# Altium PCB MINI_V001.PcbDoc
Units mm, origin at the board's own origin, x right, y up, seen from the top; angles counter-clockwise.
Board outline 42.31 x 45.25 mm, 2 copper layers (Top Layer, Bottom Layer); 51 components, 48 nets, 206 pads, 51 vias.
Unrouted connection lines stored in the file: 3.
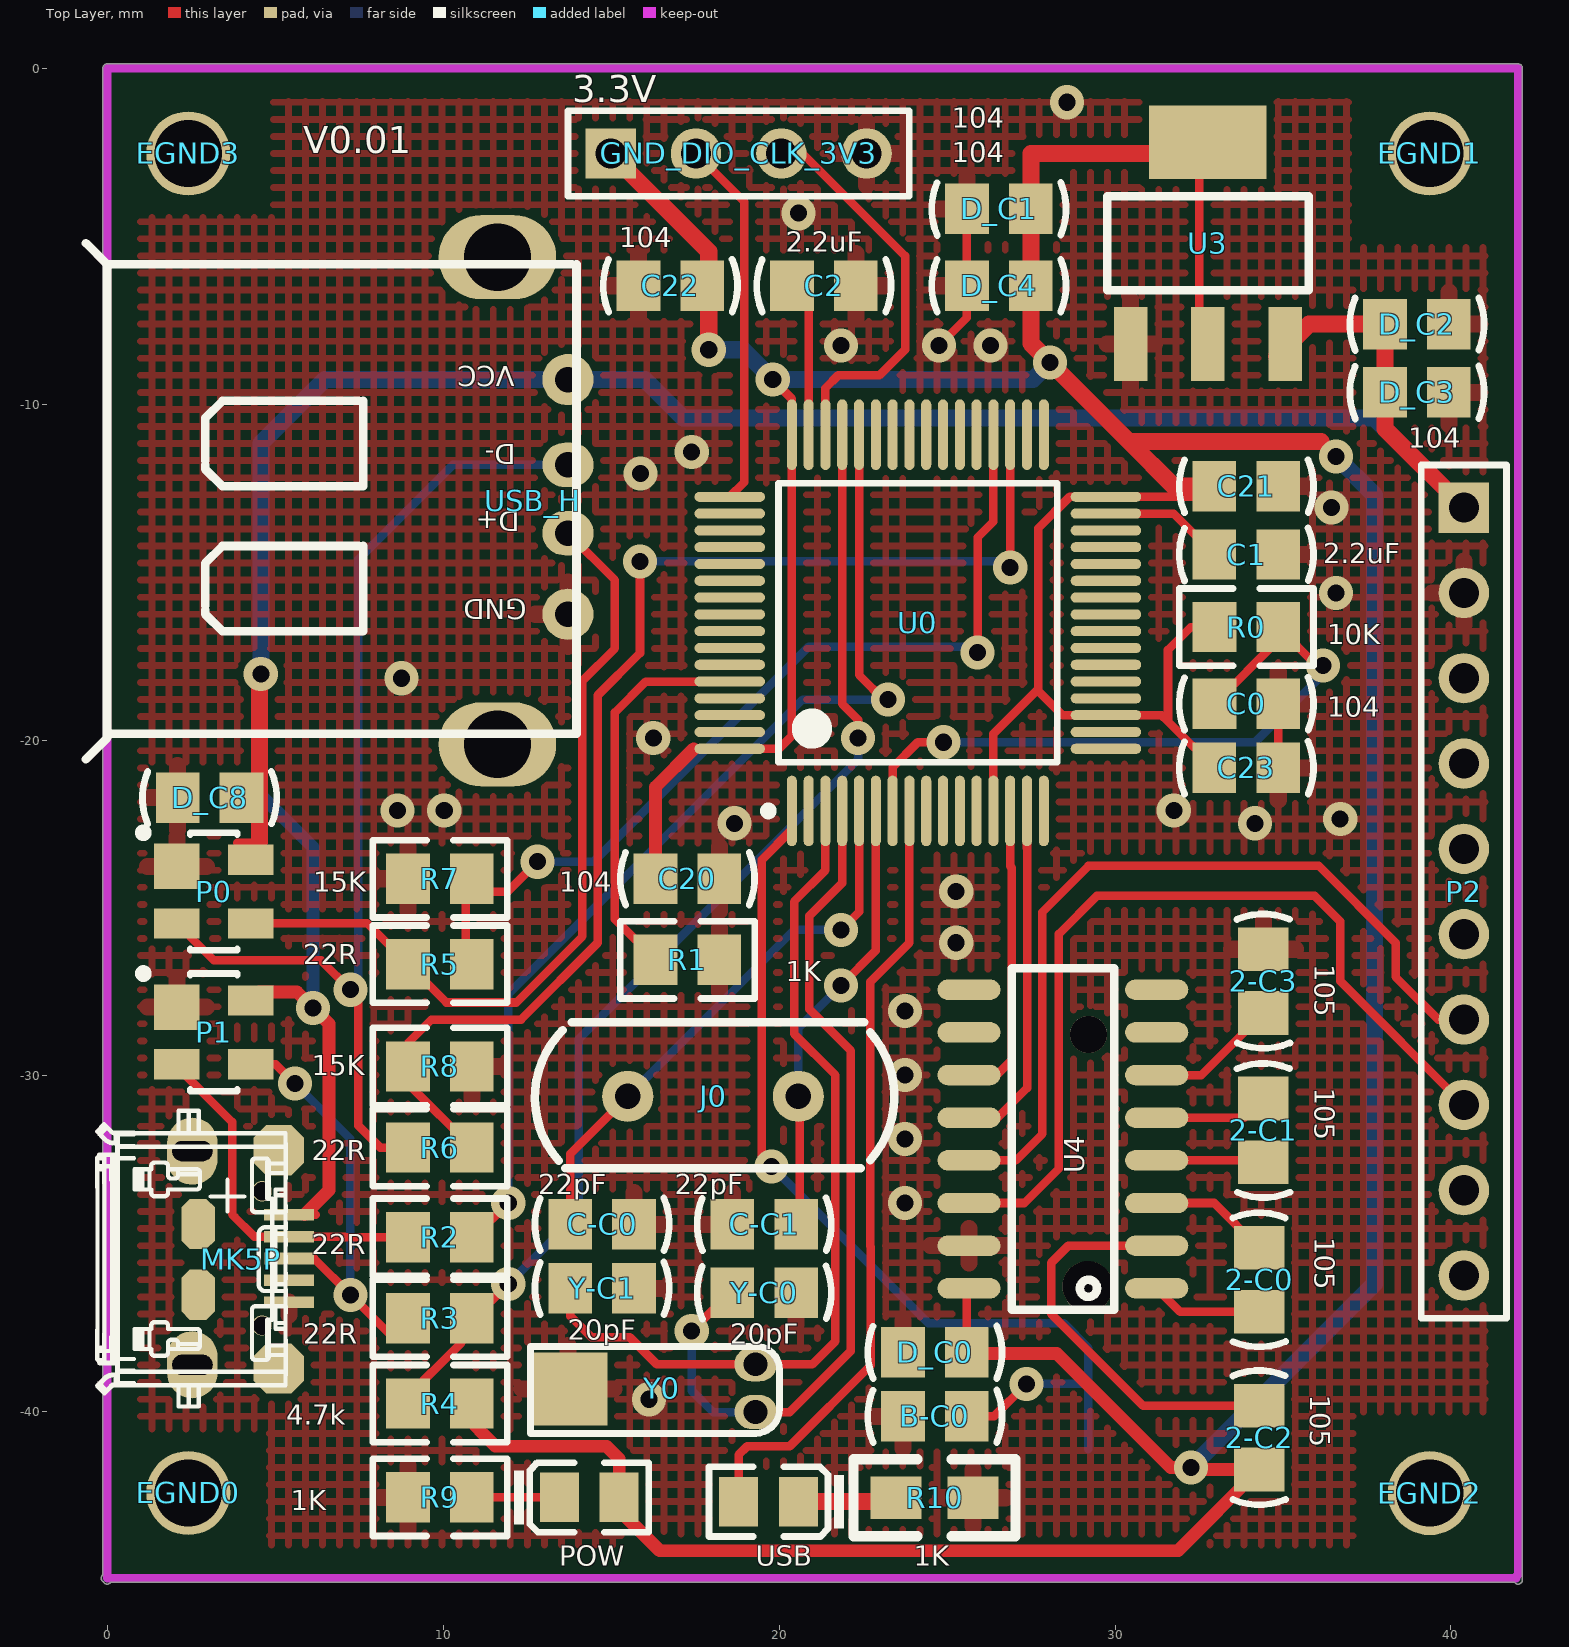
[diagram p0: Top Layer view]
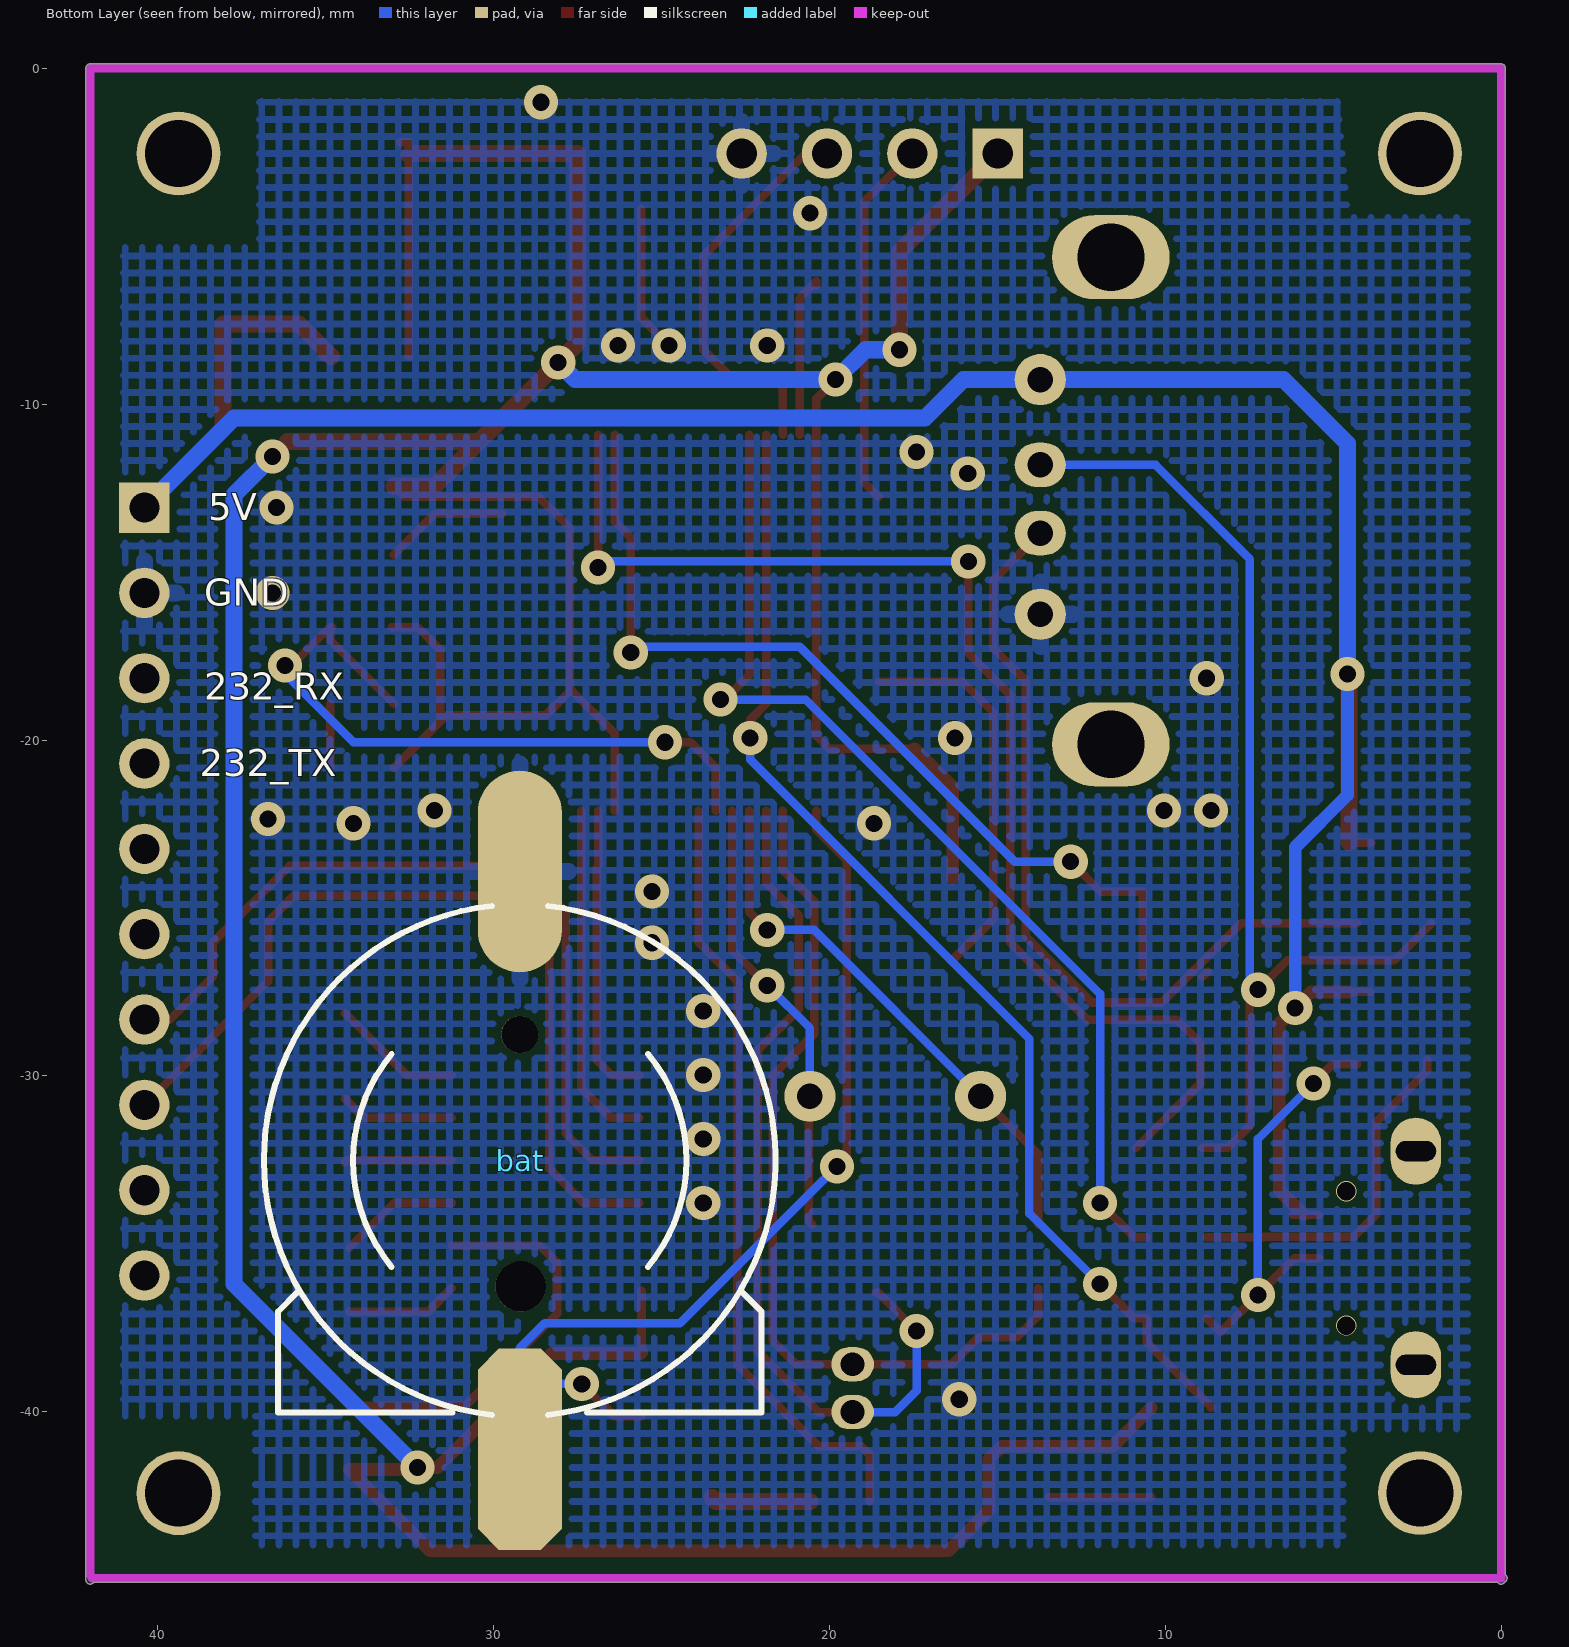
[diagram p1: Bottom Layer view, seen from below]

## Layer stack, top to bottom
Top Layer: signal copper 0.0356
Dielectric: dielectric 0.32, FR-4, Dk 4.8
Bottom Layer: signal copper 0.0356

## Board outline
-0.112,-45.061 cw(c-0.051,-44.949) -0.127,-44.847 -0.127,0 cw(c0,0) 0,0.127 42,0.127 cw(c42,0) 42.127,0 42.127,-45 cw(c42,-45) 41.898,-45.077 0.102,-45.077 cw(c0,-45)

## Design rules (kind name [scope] priority, off if disabled: settings)
Clearance Clearance_keepout [(OnLayer('Keep-Out Layer'))] p1: gap=0.762
Clearance Clearance_ploy [inpoly] p2: gap=0.203
Clearance [All] p3: gap=0.152
ComponentClearance [All] p1: gap=0.127 collisioncheckmode=3 verticalgap=0.254 showdistances=FALSE
DiffPairsRouting DiffPair_DiffPairsRouting [InDifferentialPair ('VOUT2')] p1: maxlimit=0.254 minlimit=0.254 mostfreqgap=0.254 maxuncoupledlength=12.7
DiffPairsRouting [All] p2: maxlimit=0.254 minlimit=-0.044 mostfreqgap=0.254 toplayer_maxgap=-0.044 toplayer_prefgap=3.693 bottomlayer_maxgap=-0.044 bottomlayer_prefgap=2.348 maxuncoupledlength=12.7
HoleSize [All] p1: absolutevalues=TRUE maxlimit=5 minlimit=0.025 maxpercent=80.000 minpercent=20.000
HoleSize FabricationTestpoint [All] p2: absolutevalues=TRUE maxlimit=2.54 minlimit=0.025 maxpercent=80.000 minpercent=20.000
HoleSize FabricationTestPointUsage [All] p3: absolutevalues=TRUE maxlimit=2.54 minlimit=0.025 maxpercent=80.000 minpercent=20.000
Length [All] p1: maxlimit=152.4 minlimit=0
MatchedLengths DiffPair_MatchedLengths [InDifferentialPair ('VOUT2')] p1: tolerance=25.4 checknetsindiffpair=TRUE checkdiffpairvsdiffpair=TRUE checkothers=TRUE
MinimumSolderMaskSliver [All] p1: minsoldermaskwidth=0
MinimumSolderMaskSliver SilkToSolderMaskClearance [IsPad] p2: minsoldermaskwidth=0.254
NetAntennae AssemblyTestpoint [All] p1: netantennaetolerance=0
NetAntennae [All] p2: netantennaetolerance=0
NetAntennae AssemblyTestPointUsage [All] p3: netantennaetolerance=0
NetAntennae UnpouredPolygon [All] p4: netantennaetolerance=0
NetAntennae SilkToBoardRegionClearance [All] p5: netantennaetolerance=0
PlaneConnect [All] p1: planeconnectstyle=Direct reliefexpansion=0.508 reliefentries=4 reliefconductorwidth=0.254 reliefairgap=0.254
PolygonConnect PolygonConnect_VIA [ISVIA] p1: connectstyle=Direct reliefconductorwidth=0.254 reliefentries=4 polygonreliefangle="90 Angle"
PolygonConnect [All] p2: connectstyle=Relief reliefconductorwidth=0.508 reliefentries=4 polygonreliefangle="90 Angle"
RoutingVias [All] p1: holewidth=0.4 width=0.8 viastyle="Through Hole" minholewidth=0.3 minwidth=0.6 maxholewidth=1 maxwidth=2
SilkToSilkClearance [All] p1: silktosilkclearance=0
SilkscreenOverComponentPads [All] p1: minsilkscreentomaskgap=0.254
SolderMaskExpansion [All] p1: expansion=0.102
TestPointUsage [All] p1: valid=0 allowmultiple=FALSE
Testpoint [All] p1: side=15 testpointundercomponent=TRUE minsize=1.016 maxsize=2.54 preferedsize=1.524 minholesize=0 maxholesize=1.016 preferedholesize=0.813 testpointgrid=0.025 style=1023 order=0-112345678
Width Width_VCC3.3 [InNet('G+3V3')] p1: maxlimit=2.54 minlimit=0.305 preferedwidth=0.305
Width DiffPair_Width [InDifferentialPair('VOUT2')] p2: maxlimit=0.254 minlimit=0.254 preferedwidth=0.254
Width [All] p3: maxlimit=2.54 minlimit=0.152 preferedwidth=0.203
16 further rules are at their usual default settings.

## Components (designator, comment, footprint, x,y, rotation, side; value= is the part's Value field where it differs from the comment)
2-C0 "105" C-RAD-0805 34.29,-36.068 r270 top
2-C1 "105" C-RAD-0805 34.417,-31.623 r270 top
2-C2 "105" C-RAD-0805 34.29,-40.767 r90 top
2-C3 "105" C-RAD-0805 34.417,-27.178 r270 top
B-C0 "C104" C-RAD-0805 24.638,-40.132 r0 top
bat "Battery" BATM 29.21,-32.512 r180 bottom
C0 "104" C-RAD-0805 33.909,-18.923 r0 top
C1 "2.2uF" C-RAD-0805 33.909,-14.478 r0 top
C2 "2.2uF" C-RAD-0805 21.336,-6.477 r0 top
C20 "104" C-RAD-0805 17.272,-24.13 r180 top
C21 "106" C-RAD-0805 33.909,-12.446 r180 top
C22 "104" C-RAD-0805 16.764,-6.477 r0 top
C23 "106" C-RAD-0805 33.909,-20.828 r180 top
C-C0 "22pF" C-RAD-0805 14.732,-34.417 r180 top
C-C1 "22pF" C-RAD-0805 19.558,-34.417 r0 top
D_C0 "106" C-RAD-0805 24.638,-38.227 r0 top
D_C1 "104" C-RAD-0805 26.543,-4.191 r0 top
D_C2 "106" C-RAD-0805 38.989,-7.62 r0 top
D_C3 "104" C-RAD-0805 38.989,-9.652 r0 top
D_C4 "104" C-RAD-0805 26.543,-6.477 r0 top (schematic designator D_C1)
D_C8 "106" C-RAD-0805 3.048,-21.717 r0 top (schematic designator D_C2)
EGND0 "1孔" HOLEx1 2.413,-42.412 r0 top
EGND1 "1孔" HOLEx1 39.37,-2.54 r0 top
EGND2 "1孔" HOLEx1 39.37,-42.418 r0 top
EGND3 "1孔" HOLEx1 2.413,-2.54 r0 top
GND_DIO_CLK_3V3 "Header 4" HDR1X4 14.986,-2.54 r0 top
J0 "25M" 晶振HC-49S 18.034,-30.607 r180 top
MK5P "五脚端子" USB-MICRO1 5.08,-35.433 r90 top
P0 "PRTR5V0U2X" SOT-143 3.175,-24.511 r270 top
P1 "PRTR5V0U2X" SOT-143 3.175,-28.702 r270 top
P2 "Header 10" HDR1X10 40.386,-13.081 r270 top
POW "Rled" 0805_LED_S1 14.351,-42.545 r0 top (schematic designator D0)
R0 "10K" R2012-0805 33.909,-16.637 r0 top
R1 "1K" R2012-0805 17.272,-26.543 r0 top
R2 "22R" R2012-0805 9.906,-34.798 r180 top
R3 "22R" R2012-0805 9.906,-37.211 r180 top
R4 "4.7k" R2012-0805 9.906,-39.751 r0 top
R5 "22R" R2012-0805 9.906,-26.67 r180 top
R6 "22R" R2012-0805 9.906,-32.131 r180 top
R7 "15K" R2012-0805 9.906,-24.13 r180 top
R8 "15K" R2012-0805 9.906,-29.718 r0 top
R9 "1K" R2012-0805 9.906,-42.545 r0 top
R10 "1K" 0805 25.781,-42.545 r180 top
U0 "STM32F205RBT6" LQFP-64 24.13,-16.51 r90 top
U3 "AMS1117-3.3" SOT-223 32.766,-5.207 r270 top
U4 "MAX3232" SOP-16 31.242,-36.322 r90 top
USB "Bled" 0805_LED_S1 19.685,-42.672 r180 top (schematic designator D1)
USB_H "五脚端子" USB 13.716,-9.271 r180 top
Y0 "32.768M" XTAL32 19.304,-40.005 r180 top
Y-C0 "20pF" C-RAD-0805 19.558,-36.449 r180 top
Y-C1 "20pF" C-RAD-0805 14.732,-36.322 r180 top

## Footprints (in the part's own frame and the unit in brackets; to place one, negate y for a bottom-side part, rotate by r counter-clockwise, add the part's x,y. Pads: shape width x height; smd on the part's side, far side on the other; paste and mask are expansions set on the pad)
0805 [mil]
  rect 60x50 smd: 1(0.41,0.4) 2(90.41,0.4)
  silkscreen extent -50,-45 140,45
0805_LED_S1 [mm]
  rect 1.16x1.47 smd: A(0.89,0) K(-0.89,0)
  silkscreen extent -2.25,-1.03 1.77,1.03, body extent -1.01,-0.62 1.01,0.62, height 1.1
BATM [mm]
  round 1.1 hole 1.1 unplated: 0(0,3.748)
  round 1.5 hole 1.5 unplated: 0(0.025,-3.752)
  oct 2.5x6 smd: 1(0,-8.602)
  oval 2.5x6 smd: 2(0,8.598)
  silkscreen extent -7.62,-7.58 7.62,7.57
C-RAD-0805 [mm] "贴片电容"
  rect 1.3x1.5 smd: 1(-0.95,0) 2(0.95,0)
  silkscreen extent -2,-0.79 2,0.79, body extent -1.27,-0.64 1.27,0.64, height 0.9
HDR1X4 [mm] "Connector; Header; 4 Position"
  rect 1.5x1.5 hole 0.9: 1(0,0)
  round 1.5 hole 0.9: 2(2.54,0) 3(5.08,0) 4(7.62,0)
  silkscreen extent -1.27,-1.27 8.89,1.27
HDR1X10 [mm] "Connector; Header; 10 Position"
  rect 1.5x1.5 hole 0.9: 1(0,0)
  round 1.5 hole 0.9: 2(2.54,0) 3(5.08,0) 4(7.62,0) 5(10.16,0) 6(12.7,0) 7(15.24,0) 8(17.78,0) 9(20.32,0) 10(22.86,0)
  silkscreen extent -1.27,-1.27 24.13,1.27
HOLEx1 [mm]
  round 2.5 hole 2: 1(0,0)
LQFP-64 [mm] "LQFP64"
  oval 2.1x0.3 smd: 1(-5.6,3.75) 2(-5.6,3.25) 3(-5.6,2.75) 4(-5.6,2.25) 5(-5.6,1.75) 6(-5.6,1.25) 7(-5.6,0.75) 8(-5.6,0.25) 9(-5.6,-0.25) 10(-5.6,-0.75) 11(-5.6,-1.25) 12(-5.6,-1.75) 13(-5.6,-2.25) 14(-5.6,-2.75) 15(-5.6,-3.25) 16(-5.6,-3.75) 33(5.6,-3.75) 34(5.6,-3.25) 35(5.6,-2.75) 36(5.6,-2.25) 37(5.6,-1.75) 38(5.6,-1.25) 39(5.6,-0.75) 40(5.6,-0.25) 41(5.6,0.25) 42(5.6,0.75) 43(5.6,1.25) 44(5.6,1.75) 45(5.6,2.25) 46(5.6,2.75) 47(5.6,3.25) 48(5.6,3.75)
  oval 0.3x2.1 smd: 17(-3.75,-5.6) 18(-3.25,-5.6) 19(-2.75,-5.6) 20(-2.25,-5.6) 21(-1.75,-5.6) 22(-1.25,-5.6) 23(-0.75,-5.6) 24(-0.25,-5.6) 25(0.25,-5.6) 26(0.75,-5.6) 27(1.25,-5.6) 28(1.75,-5.6) 29(2.25,-5.6) 30(2.75,-5.6) 31(3.25,-5.6) 32(3.75,-5.6) 49(3.75,5.6) 50(3.25,5.6) 51(2.75,5.6) 52(2.25,5.6) 53(1.75,5.6) 54(1.25,5.6) 55(0.75,5.6) 56(0.25,5.6) 57(-0.25,5.6) 58(-0.75,5.6) 59(-1.25,5.6) 60(-1.75,5.6) 61(-2.25,5.6) 62(-2.75,5.6) 63(-3.25,5.6) 64(-3.75,5.6)
  silkscreen extent -5.72,-4.15 4.15,4.57, body extent -5,-5 5,5, height 1.6
R2012-0805 [mm] "Thermistor; 2 Leads"
  rect 1.3x1.5 smd: 1(-0.95,0) 2(0.95,0)
  silkscreen extent -2,-1.15 2,1.15, body extent -1.02,-0.64 0.98,0.62
SOP-16 [mil]
  oval 24x74 smd: 1(0,0) 2(50,0) 3(100,0) 4(150,0) 5(200,0) 6(250,0) 7(300,0) 8(350,0) 9(350,220) 10(300,220) 11(250,220) 12(200,220) 13(150,220) 14(100,220) 15(50,220) 16(0,220)
  silkscreen extent -25,50 375,170, body extent -19,-5 367,223, height 69
SOT-143 [mm] "SOT-143; 4 Leads; Body 3 x 2.6 mm, inc. leads (LxW max)"
  rect 1.35x1.35 smd: 1(-0.75,-1.1)
  rect 0.9x1.35 smd: 2(0.95,-1.1) 3(0.95,1.1) 4(-0.95,1.1)
  silkscreen extent -1.87,-2.22 1.75,0.7
SOT-223 [mm]
  rect 2.2x1 smd: 1(3,-2.3) 2(3,0) 3(3,2.3)
  rect 2.2x3.5 smd: 2(-3,0)
  silkscreen extent -1.4,-3 1.4,3, body extent -3.49,-3.24 3.49,3.24, height 1.64
USB [mil]
  round 60 hole 30: 1(0,0) 4(0,275)
  oval 60x52.13 hole 30: 2(0,100) 3(0,180)
  oval 137.79x98.42 hole 78.74: VSS(82.68,427.44) VSS2(82.68,-143.43)
  silkscreen extent -10,-160 565,445, body extent -16,-173 539,449, height 250
USB-MICRO1 [mm] "USB AF/10.0 4P母座卷边SMT(前插后贴) H=6.8mm"
  rect 0.35x1.5 smd: 1(-1.3,-0.33) 2(-0.65,-0.33) 3(0,-0.33) 4(0.65,-0.33) 5(1.3,-0.33)
  oct 1.5x1.5 smd: ""(-3.275,-0.025) ""(3.225,-0.025)
  oval 2x1.5 hole 0.6 slot 1.2 at 90 deg: ""(-3.165,2.545) ""(3.195,2.545)
  oct 1.5x1 smd: ""(-1.075,2.375) ""(1.025,2.375)
  silkscreen extent -4.41,-0.23 4.4,5.39
XTAL32 [mil]
  oval 50x40 hole 28: 1(0,0) 2(0,-56)
  rect 92.13x86 smd: ""(220,-27)
  silkscreen extent -28,-77 264,25
晶振HC-49S [mil]
  round 60 hole 30: 1(100,0) 2(-100,0)
  silkscreen extent -212,-87 209,84, body extent -223,-93 223,90, height 138

## Part data
2-C0 2-C1 2-C2 2-C3: library part "0805 1uF (105) 10% 50V", "贴片电容"
B-C0: library part "Cap Semi", "Capacitor (Semiconductor SIM Model)"
bat: "Multicell Battery"
C0 D_C0 D_C1 D_C2 D_C3 D_C4 D_C8: library part "0805 100nF(104) 10% 50V", "贴片电容"
C1 C2: library part "0805 2.2uF (225) 20% 50V", "贴片电容"
C20 C21 C22 C23: library part Cap, "Capacitor"
C-C0 C-C1: library part "0603 22pF (220) 5% 50V", "贴片电容"
GND_DIO_CLK_3V3: "Header, 4-Pin"
J0: library part 晶振
P2: "Header, 10-Pin"
POW: library part "0805 红灯", "发光二极管"
R0 R2 R3 R4 R5 R6 R7 R8 R9 R10: library part "0805 1KΩ (1001) 1%", "贴片电阻"
R1: library part "0603 1KΩ (1001) 1%", "贴片电阻"
U0: "ARM Cortex-M3 32-bit MCU, 128 KB Flash, 64 KB Internal RAM, 51 I/Os, 64-pin LQFP, -40 to 85 degC, Tray"
U3: library part "SOT-223 AMS1117-3.3", "低压差线性稳压(LDO)"
USB: library part "0805 蓝灯", "发光二极管"
Y0: library part XTAL, "Crystal Oscillator"
Y-C0 Y-C1: library part "0805 20pF (200) 5% 50V", "贴片电容"

## Via types
v1: diameter 1.016, hole 0.508, Top Layer to Bottom Layer, 49 vias
v2: diameter 0.6, hole 0.55, Top Layer to Bottom Layer, 2 vias

## Nets (pads, with @x,y where several pads share a name; then routed paths per layer and width w, separated by ;. In a path a pad name is that pad's centre, name@x,y a point inside that pad or via, vN(x,y) a via of type N, cw(c..) or ccw(c..) an arc to the next point about the centre after c; other vN are vias at no path point)
BAT: B-C0.2 bat.1 U0.1 | length 29.8
  Top Layer w0.254: v1(19.771,-32.69) 19.482,-32.4 19.482,-23.571 20.38,-22.673 U0.1 ; B-C0.2 26.401,-40.132 v1(27.366,-39.167)
  Bottom Layer w0.254: v1(19.771,-32.69) 24.445,-37.363 28.473,-37.363 29.21,-38.1 bat.1@29.21,-39.167 ; v1(27.366,-39.167) bat.1@29.21,-39.167 ; bat.1 bat.1@29.21,-39.167
GND: 2-C3.1 B-C0.1 bat.2 C0.2 C1.2 C2.2 C20.1 C21.1 C22.1 C23.1 C-C0.1 C-C1.1 D_C0.1 D_C1.1 D_C2.2 D_C3.2 D_C4.1 D_C8.1 GND_DIO_CLK_3V3.4 MK5P.1 P0.1 P1.1 P2.2 R1.2 R7.2 R8.2 R9.1 R10.1 U0.12 U0.18 U0.63 U3.1 U4.15 USB_H.4 Y0. Y-C0.1 Y-C1.1 | length 6.3
  Top Layer w0.254: v1(24.765,-8.255) 25.593,-7.427 D_C4.1 D_C1.1 ; C23.1 C0.2
  other v1: 16.129,-39.624 23.749,-33.782 23.749,-31.877 23.749,-29.972 23.749,-28.067 25.273,-26.035 25.273,-24.511 18.669,-22.479 34.163,-22.479 36.703,-22.352 8.636,-22.098 10.033,-22.098 31.75,-22.098 16.256,-19.939 8.763,-18.161 36.576,-15.621 36.449,-13.081 15.875,-12.065 17.399,-11.43 21.844,-8.255 26.289,-8.255 20.574,-4.318 28.575,-1.016
IO2: P0.2 R6.2 USB_H.2 | length 31.8
  Top Layer w0.254: P0.2 3.175,-26.561 6.368,-26.561 v1(7.239,-27.432) ; v1@7.478,-27.432 7.478,-31.481 8.128,-32.131 R6.2@8.889,-32.131
  Bottom Layer w0.254: v1@7.478,-27.356 7.478,-14.62 10.287,-11.811 USB_H.2
IO3: P0.3 R5.2 USB_H.3 | length 24.9
  Top Layer w0.254: P0.3 7.747,-25.461 R5.2 10.099,-27.813 12.18,-27.813 14.148,-25.846 14.148,-18.237 15.113,-17.272 15.113,-15.24 USB_H.3 ; R5.2@8.732,-26.894 R5.2@8.889,-27.051
IO4: MK5P.4 P1.2 R2.2 | length 10.7
  Top Layer w0.254: P1.2@2.202,-29.525 2.202,-29.652 2.202,-29.852 3.719,-31.369 3.719,-34.123 ; 3.81,-34.214 3.719,-34.123 ; R2.2@8.762,-34.798 7.086,-34.798 7.071,-34.783 MK5P.4 4.379,-34.783 3.719,-34.123
IO5: MK5P.3 P1.3 R3.2 | length 13.3
  Top Layer w0.254: P1.3 5.014,-29.652 v1(5.588,-30.226) ; MK5P.3 6.157,-35.433 v1(7.239,-36.515) 8.349,-37.624 R3.2@8.762,-37.211
  Bottom Layer w0.254: v1(5.588,-30.226) 7.239,-31.877 7.239,-32.629 ; v1(7.239,-36.515) 7.239,-32.629 ; 7.239,-33.02 7.239,-32.629
LED0: U0.8 USB.A | length 23.4
  Top Layer w0.254: USB.A 18.795,-41.276 19.05,-41.021 20.32,-41.021 22.733,-38.608 22.733,-35.079 22.718,-35.064 22.718,-27.197 23.88,-26.035 U0.8
LED1: U0.9
Net2-C0_1: 2-C0.1 U4.3 | length 3.6
  Top Layer w0.254: U4.3 32.954,-33.782 2-C0.1
Net2-C0_2: 2-C0.2 U4.1 | length 3.3
  Top Layer w0.254: U4.1 31.938,-37.018 2-C0.2
Net2-C1_1: 2-C1.1 U4.5 | length 3.4
  Top Layer w0.254: U4.5 33.848,-31.242 2-C1.1
Net2-C1_2: 2-C1.2 U4.4 | length 3.2
  Top Layer w0.254: U4.4 34.356,-32.512 2-C1.2
Net2-C2_2: 2-C2.2 U4.2 | length 12.2
  Top Layer w0.254: U4.2 28.611,-35.052 28.103,-35.56 28.103,-37.084 30.836,-39.817 2-C2.2
Net2-C3_2: 2-C3.2 U4.6 | length 3.9
  Top Layer w0.254: U4.6 32.573,-29.972 2-C3.2
NetC1_1: C1.1 U0.31 | length 3.7
  Top Layer w0.254: U0.31 31.741,-13.26 C1.1
NetC2_1: C2.1 U0.47 | length 4.9
  Top Layer w0.254: C2.1 20.386,-6.35 20.449,-6.413 20.88,-6.844 U0.47
NetD0_K: POW.K R9.2 | length 3
  Top Layer w0.254: R9.2@10.415,-42.545 R9.2 POW.K
NetD1_K: R10.2 USB.K | length 3
  Top Layer w0.508: USB.K 23.368,-42.672 R10.2
NetR1_1: R1.1 U0.60 | length 11.7
  Top Layer w0.254: R1.1 15.113,-25.334 15.113,-19.177 16.03,-18.26 U0.60 ; R1.1@16.352,-26.513 R1.1@16.382,-26.543
NRST: C0.1 R0.2 U0.7 | length 20.9
  Top Layer w0.254: U0.7 23.38,-20.816 24.13,-20.066 v1(24.892,-20.066) ; C0.1 34.859,-17.023 R0.2 36.002,-17.78 v1(36.195,-17.78) 36.576,-17.78 v1@36.449,-17.653 ; R0.2@34.799,-16.637 R0.2@34.829,-16.667
  Bottom Layer w0.254: v1(24.892,-20.066) 34.163,-20.066 v1@36.322,-17.907
OSC32_IN: U0.3 Y0.2 Y-C1.2 | length 26.3
  Top Layer w0.254: Y-C1.2 13.782,-37.15 14.412,-37.78 15.555,-37.78 16.358,-38.583 Y0.2 20.991,-38.583 21.676,-37.897 21.676,-29.972 20.447,-28.743 20.447,-24.809 21.38,-23.876 U0.3
OSC32_OUT: U0.4 Y0.1 Y-C0.2 | length 26.2
  Top Layer w0.254: v1(17.399,-37.592) 18.542,-36.449 Y-C0.2 ; Y0.1 20.32,-40.005 22.134,-38.191 22.134,-29.246 20.904,-28.016 20.904,-25.233 21.88,-24.257 U0.4
  Bottom Layer w0.254: v1(17.399,-37.592) 17.399,-39.37 18.034,-40.005 Y0.1
OSC_IN: C-C0.2 J0.1 U0.5 | length 16.7
  Top Layer w0.254: C-C0.2 13.782,-32.319 J0.1 ; v1(21.844,-25.654) 22.38,-25.118 U0.5
  Bottom Layer w0.254: J0.1 20.447,-25.654 v1(21.844,-25.654)
OSC_OUT: C-C1.2 J0.2 U0.6 | length 13.3
  Top Layer w0.254: C-C1.2 20.61,-34.315 20.61,-30.643 J0.2 ; v1(21.844,-27.305) 22.88,-26.269 U0.6
  Bottom Layer w0.254: J0.2 20.574,-28.575 v1(21.844,-27.305)
RS232_RX: P2.7 U4.13 | length 25.4
  Top Layer w0.254: U4.13 27.051,-32.512 27.838,-31.725 27.838,-27.026 ; 27.838,-27.686 27.838,-27.026 ; P2.7 39.624,-28.321 38.354,-27.051 38.354,-26.035 36.068,-23.749 29.21,-23.749 27.838,-25.121 27.838,-27.026
RS232_TX: P2.8 U4.14 | length 26.6
  Top Layer w0.254: U4.14 27.305,-33.782 28.33,-32.757 28.33,-27.296 ; 28.33,-27.686 28.33,-27.296 ; P2.8 36.703,-27.178 36.703,-25.4 35.941,-24.638 29.464,-24.638 28.33,-25.772 28.33,-27.296
RS485_RE: U0.33
SD_CK: U0.53
SD_CMD: U0.54
SD_D0: U0.39
SD_D1: U0.40
SD_D2: U0.51
SD_D3: U0.52
SD_EXTI: U0.41
SW_CLK: GND_DIO_CLK_3V3.2 U0.49 | length 11.3
  Top Layer w0.254: GND_DIO_CLK_3V3.2 18.959,-3.973 18.959,-10.312 ; U0.49 18.959,-12.331 18.959,-10.312 ; 18.959,-10.033 18.959,-10.312
SWDIO: GND_DIO_CLK_3V3.3 U0.46 | length 12
  Top Layer w0.254: GND_DIO_CLK_3V3.3 20.701,-2.54 23.749,-5.588 23.749,-8.382 22.987,-9.144 21.761,-9.144 21.38,-9.525 U0.46
UART1_RX: U0.43
UART1_TX: U0.42
UART4_RX: U0.15 U4.12 | length 10.3
  Top Layer w0.254: U4.12 26.502,-31.242 27.381,-30.363 27.381,-23.216 27.38,-23.214 U0.15
UART4_TX: U0.14 U4.11 | length 8.9
  Top Layer w0.254: U4.11 26.477,-29.972 26.924,-29.525 26.924,-23.8 26.88,-23.756 U0.14
UART6_RX: U0.38
UART6_TX: U0.37
USB_D+: R3.1 R4.1 U0.45 | length 35.1
  Top Layer w0.254: R4.1@8.635,-39.878 8.635,-39.85 8.845,-39.64 10.542,-37.943 10.542,-37.211 R3.1 10.922,-37.211 v1(11.938,-36.195) ; U0.45 21.88,-18.923 22.352,-19.395 v1(22.352,-19.939)
  Bottom Layer w0.254: v1(11.938,-36.195) 14.039,-34.094 14.039,-28.898 22.352,-20.584 v1(22.352,-19.939)
USB_D-: R2.1 U0.44 | length 31.3
  Top Layer w0.254: R2.1@10.542,-34.798 R2.1 10.922,-34.798 v1(11.938,-33.782) ; U0.44 22.38,-18.062 23.177,-18.86 v1@23.368,-19.05
  Bottom Layer w0.254: v1(11.938,-33.782) 11.938,-27.559 20.701,-18.796 v1@22.987,-18.796
  other v1: 23.241,-18.796
USB_HD+: R5.1 R7.1 U0.36 | length 27.8
  Top Layer w0.254: R5.1@10.669,-27.051 10.669,-26.67 10.669,-24.511 10.856,-24.511 11.923,-24.511 v1(12.812,-23.622) ; v1(25.908,-17.399) 25.908,-13.97 26.38,-13.498 U0.36
  Bottom Layer w0.254: v1(12.812,-23.622) 14.478,-23.622 20.879,-17.221 23.531,-17.221 ; 23.241,-17.221 23.531,-17.221 ; v1(25.908,-17.399) 25.73,-17.221 23.531,-17.221
USB_HD-: R6.1 R8.1 U0.35 | length 37.7
  Top Layer w0.254: R6.1 8.956,-30.231 R8.1 8.956,-29.017 9.652,-28.321 12.319,-28.321 14.605,-26.035 14.605,-18.669 15.86,-17.414 v1(15.86,-14.681) ; v1(26.88,-14.859) U0.35
  Bottom Layer w0.254: v1(15.86,-14.681) 26.702,-14.681 v1(26.88,-14.859)
VCC_3.3V: 2-C2.1 C20.2 C21.2 C22.2 C23.2 D_C0.2 D_C1.2 D_C4.2 GND_DIO_CLK_3V3.1 POW.A R0.1 R4.2 U0.13 U0.19 U0.32 U0.48 U0.64 U3.2 U4.16 | length 163.6
  Top Layer w0.254: 17.459,-20.26 U0.64 20,-20.26 20.38,-19.88 U0.48 20.38,-9.839 v1(19.812,-9.271) ; D_C0.2 U4.16@25.588,-36.388 ; U0.13 26.38,-19.812 27.686,-18.506 ; U3.2@32.512,-8.588 32.512,-8.207 32.512,-2.588 32.512,-2.207 U3.2@32.766,-2.207 ; C23.2 31.577,-19.446 ; C21.2 32.645,-12.76 U0.32 28.651,-12.76 27.718,-13.693 27.718,-18.474 27.686,-18.506 ; R0.1@33.019,-16.637 R0.1 32.258,-16.637 31.577,-17.318 31.577,-19.446 ; 27.686,-18.506 28.44,-19.26 U0.19 31.391,-19.26 31.577,-19.446
  Top Layer w0.381: R4.2@10.415,-39.878 10.572,-40.035 11.558,-41.021 14.859,-41.021 15.241,-41.403 POW.A 15.241,-42.927 16.447,-44.133 31.875,-44.133 2-C2.1 v1@32.258,-41.717 ; C20.2 16.322,-21.397 17.459,-20.26 ; D_C0.2 25.626,-38.265 28.268,-38.265 31.659,-41.656 v1(32.258,-41.656)
  Top Layer w0.508: GND_DIO_CLK_3V3.1 17.907,-5.461 17.907,-6.477 v1(17.907,-8.382) v1@17.907,-8.509 ; U3.2@32.512,-2.588 32.464,-2.54 27.493,-2.54 D_C1.2 D_C4.2 27.493,-8.189 v1(28.067,-8.763) 30.416,-11.112 ; C21.2 31.75,-12.446 30.416,-11.112 ; 36.131,-11.112 30.416,-11.112
  Bottom Layer w0.508: v1(17.907,-8.382) 18.923,-8.382 v1(19.812,-9.271) 27.559,-9.271 v1(28.067,-8.763) ; v1(32.258,-41.656) 37.719,-36.195 37.719,-12.7 v1(36.576,-11.557)
VCC_5V: D_C2.1 D_C3.1 D_C8.2 MK5P.5 P0.4 P1.4 P2.1 U3.3 USB_H.1 | length 81.9
  Top Layer w0.254: 3.871,-23.053 4.275,-23.053 4.529,-23.053 ; P1.4@3.896,-27.498 4.275,-27.498 P1.4@4.529,-27.498 ; MK5P.5 5.872,-34.133 6.208,-34.133 ; U3.3@34.812,-8.588 35.066,-8.588 35.066,-8.334 U3.3
  Top Layer w0.381: P1.4@4.529,-27.498 5.654,-27.498 v1(6.129,-27.973) 6.604,-28.448 6.604,-33.401 MK5P.5@5.872,-34.133
  Top Layer w0.508: 4.529,-23.053 4.529,-21.717 v1@4.529,-18.034 ; U3.3@34.812,-8.588 35.066,-8.334 35.13,-8.27 35.78,-7.62 D_C2.1 D_C3.1 38.039,-10.734 P2.1
  Bottom Layer w0.381: v1(4.572,-18.034) 4.572,-21.633 6.129,-23.19 v1(6.129,-27.973)
  Bottom Layer w0.508: v1(4.572,-18.034) 4.572,-11.176 6.477,-9.271 USB_H.1 16.002,-9.271 17.145,-10.414 37.719,-10.414 P2.1
pads on no net: bat.0 EGND0.1 EGND1.1 EGND2.1 EGND3.1 MK5P. MK5P.2 P2.3 P2.4 P2.5 P2.6 P2.9 P2.10 U0.2 U0.10 U0.11 U0.16 U0.17 U0.20 U0.21 U0.22 U0.23 U0.24 U0.25 U0.26 U0.27 U0.28 U0.29 U0.30 U0.34 U0.50 U0.55 U0.56 U0.57 U0.58 U0.59 U0.61 U0.62 U4.7 U4.8 U4.9 U4.10 USB_H.VSS USB_H.VSS2
copper on no net:
  other v2: 4.61,-37.433 4.61,-33.433

## Polygon pours and split planes (outlines as drawn)
GND on Top Layer "Top Layer-No Net" (hatched 90Degree grid 0.508 track 0.203): 0,-4.699 0.254,-4.445 4.953,-4.445 4.953,-0.127 5.08,0 36.957,0 36.957,-5.334 41.746,-5.334 42,-5.588 42,-40.005 37.211,-40.005 37.084,-39.878 37.084,-44.949 4.826,-44.949 4.826,-40.513 0,-40.513
GND on Bottom Layer "Top Layer-No Net" (hatched 90Degree grid 0.508 track 0.203): 4.953,0 36.957,0 36.957,-5.08 37.211,-5.334 42,-5.334 42,-40.132 37.084,-40.132 37.084,-44.949 4.826,-44.949 4.699,-44.822 4.699,-40.513 0.254,-40.513 0,-40.259 0,-4.445 4.572,-4.445

## Keep-outs
Keep-Out Layer:
  lines w0.1: 0,0 42,0
  lines w0.254: 0,-44.949 0,0 42,0 42,-44.847 41.949,-44.898 41.949,-44.949 0,-44.949

## Silkscreen, mask and mechanical layers (free items; w line width, h text height)
Top Overlay:
  text "3.3V" at 13.843,-1.016 h0.8
  text "V0.01" at 5.842,-2.54 h0.8
Bottom Overlay:
  text "5V" at 38.481,-13.462 h0.8
  text "GND" at 38.608,-16.002 h0.8
  text "232_RX" at 38.608,-18.796 h0.8
  text "232_TX" at 38.735,-21.082 h0.8

## Text inside footprints (layer, text, board x,y; h text height)
USB_H: Top Overlay "GND" at 12.494,-15.817 h0.6 r180; Top Overlay "VCC" at 12.131,-8.868 h0.6 r180; Top Overlay "D+" at 12.282,-13.189 h0.6 r180; Top Overlay "D-" at 12.161,-11.195 h0.6 r180